# EAGLE board CT_schematic (EAGLE 7.6.0)

Size 100 x 80 mm. Coordinates in mm from the lower left corner, seen from the top.
Outline: 0,0 100,0 100,80 0,80 0,0
Copper layers (1*16): Top 0.035mm / dielectric 1.5mm / Bottom 0.035mm
Design rules "default": minimum track width 10mil, minimum drill 24mil, track to track 8mil, track to pad 8mil, pad to pad 8mil, via to via 8mil, smd to smd 8mil, copper to edge 40mil, drill to drill 8mil, minimum pad ring 10mil, minimum via ring 8mil, stop-mask expansion 4mil, vias tented up to drill 0mil, thermal gap 10mil

## Footprints (pad centres in the part's own frame; a part is rotated, then mirrored left to right if it is on the bottom)
C0603 = smd 0.8 x 0.8: 1 -0.762,0; 2 0.762,0
C0402 = smd 0.5 x 0.5: 1 -0.508,0; 2 0.508,0
C0805 = smd 1.2 x 1.3: 1 -1.016,0; 2 1.016,0
C1206 = smd 1.3 x 1.6: 1 -1.524,0; 2 1.524,0
2220 = smd 1.85 x 5.5: 1 -2.55,0; 2 2.55,0
R0603 = smd 0.8 x 0.8: 1 -0.762,0; 2 0.762,0
EXV-9H = smd 3.505 x 1.676: 1 -2.857,0; 2 2.857,0
L0603 = smd 0.8 x 0.8: 1 -0.762,0; 2 0.762,0
DR1040 = smd 1.6 x 3.2: 1 -4.458,0; 2 4.458,0
PJ-037B_PACKAGE = drill 3.7 square: 1 12,0 | drill 3.2 square: 2 6,0
UFBGA176_25 = smd 0.3 x 0.3: A1 -4.55,4.55; A2 -3.9,4.55; A3 -3.25,4.55; A4 -2.6,4.55; A5 -1.95,4.55; A6 -1.3,4.55; A7 -0.65,4.55; A8 0,4.55; A9 0.65,4.55; A10 1.3,4.55; A11 1.95,4.55; A12 2.6,4.55; A13 3.25,4.55; A14 3.9,4.55; A15 4.55,4.55; B1 -4.55,3.9; B2 -3.9,3.9; B3 -3.25,3.9; B4 -2.6,3.9; B5 -1.95,3.9; B6 -1.3,3.9; B7 -0.65,3.9; B8 0,3.9; B9 0.65,3.9; B10 1.3,3.9; B11 1.95,3.9; B12 2.6,3.9; B13 3.25,3.9; B14 3.9,3.9; B15 4.55,3.9; C1 -4.55,3.25; C2 -3.9,3.25; C3 -3.25,3.25; C4 -2.6,3.25; C5 -1.95,3.25; C6 -1.3,3.25; C7 -0.65,3.25; C8 0,3.25; C9 0.65,3.25; C10 1.3,3.25; C11 1.95,3.25; C12 2.6,3.25; C13 3.25,3.25; C14 3.9,3.25; C15 4.55,3.25; D1 -4.55,2.6; D2 -3.9,2.6; D3 -3.25,2.6; D4 -2.6,2.6; D5 -1.95,2.6; D6 -1.3,2.6; D7 -0.65,2.6; D8 0,2.6; D9 0.65,2.6; D10 1.3,2.6; D11 1.95,2.6; D12 2.6,2.6; D13 3.25,2.6; D14 3.9,2.6; D15 4.55,2.6; E1 -4.55,1.95; E2 -3.9,1.95; E3 -3.25,1.95; E4 -2.6,1.95; E12 2.6,1.95; E13 3.25,1.95; E14 3.9,1.95; E15 4.55,1.95; F1 -4.55,1.3; F2 -3.9,1.3; F3 -3.25,1.3; F4 -2.6,1.3; F6 -1.3,1.3; F7 -0.65,1.3; F8 0,1.3; F9 0.65,1.3; F10 1.3,1.3; F12 2.6,1.3; F13 3.25,1.3; F14 3.9,1.3; F15 4.55,1.3; G1 -4.55,0.65; G2 -3.9,0.65; G3 -3.25,0.65; G4 -2.6,0.65; G6 -1.3,0.65; G7 -0.65,0.65; G8 0,0.65; G9 0.65,0.65; G10 1.3,0.65; G12 2.6,0.65; G13 3.25,0.65; G14 3.9,0.65; G15 4.55,0.65; H1 -4.55,0; H2 -3.9,0; H3 -3.25,0; H4 -2.6,0; H6 -1.3,0; H7 -0.65,0; H8 0,0; H9 0.65,0; H10 1.3,0; H12 2.6,0; H13 3.25,0; H14 3.9,0; H15 4.55,0; J1 -4.55,-0.65; J2 -3.9,-0.65; J3 -3.25,-0.65; J4 -2.6,-0.65; J6 -1.3,-0.65; J7 -0.65,-0.65; J8 0,-0.65; J9 0.65,-0.65; J10 1.3,-0.65; J12 2.6,-0.65; J13 3.25,-0.65; J14 3.9,-0.65; J15 4.55,-0.65; K1 -4.55,-1.3; K2 -3.9,-1.3; K3 -3.25,-1.3; K4 -2.6,-1.3; K6 -1.3,-1.3; K7 -0.65,-1.3; K8 0,-1.3; K9 0.65,-1.3; K10 1.3,-1.3; K12 2.6,-1.3; K13 3.25,-1.3; K14 3.9,-1.3; K15 4.55,-1.3; L1 -4.55,-1.95; L2 -3.9,-1.95; L3 -3.25,-1.95; L4 -2.6,-1.95; L12 2.6,-1.95; L13 3.25,-1.95; L14 3.9,-1.95; L15 4.55,-1.95; M1 -4.55,-2.6; M2 -3.9,-2.6; M3 -3.25,-2.6; M4 -2.6,-2.6; M5 -1.95,-2.6; M6 -1.3,-2.6; M7 -0.65,-2.6; M8 0,-2.6; M9 0.65,-2.6; M10 1.3,-2.6; M11 1.95,-2.6; M12 2.6,-2.6; M13 3.25,-2.6; M14 3.9,-2.6; M15 4.55,-2.6; N1 -4.55,-3.25; N2 -3.9,-3.25; N3 -3.25,-3.25; N4 -2.6,-3.25; N5 -1.95,-3.25; N6 -1.3,-3.25; N7 -0.65,-3.25; N8 0,-3.25; N9 0.65,-3.25; N10 1.3,-3.25; N11 1.95,-3.25; N12 2.6,-3.25; N13 3.25,-3.25; N14 3.9,-3.25; N15 4.55,-3.25; P1 -4.55,-3.9; P2 -3.9,-3.9; P3 -3.25,-3.9; P4 -2.6,-3.9; P5 -1.95,-3.9; P6 -1.3,-3.9; P7 -0.65,-3.9; P8 0,-3.9; P9 0.65,-3.9; P10 1.3,-3.9; P11 1.95,-3.9; P12 2.6,-3.9; P13 3.25,-3.9; P14 3.9,-3.9; P15 4.55,-3.9; R1 -4.55,-4.55; R2 -3.9,-4.55; R3 -3.25,-4.55; R4 -2.6,-4.55; R5 -1.95,-4.55; R6 -1.3,-4.55; R7 -0.65,-4.55; R8 0,-4.55; R9 0.65,-4.55; R10 1.3,-4.55; R11 1.95,-4.55; R12 2.6,-4.55; R13 3.25,-4.55; R14 3.9,-4.55; R15 4.55,-4.55
SSOP-28 = smd 1.5 x 0.4: 1 -3.625,4.225; 2 -3.625,3.575; 3 -3.625,2.925; 4 -3.625,2.275; 5 -3.625,1.625; 6 -3.625,0.975; 7 -3.625,0.325; 8 -3.625,-0.325; 9 -3.625,-0.975; 10 -3.625,-1.625; 11 -3.625,-2.275; 12 -3.625,-2.925; 13 -3.625,-3.575; 14 -3.625,-4.225; 15 3.625,-4.225; 16 3.625,-3.575; 17 3.625,-2.925; 18 3.625,-2.275; 19 3.625,-1.625; 20 3.625,-0.975; 21 3.625,-0.325; 22 3.625,0.325; 23 3.625,0.975; 24 3.625,1.625; 25 3.625,2.275; 26 3.625,2.925; 27 3.625,3.575; 28 3.625,4.225
FCI_10118193-0001LF = smd 0.4 x 1.35: 1 -1.3,2.675; 2 -0.65,2.675; 3 0,2.675; 4 0.65,2.675; 5 1.3,2.675 | smd 1.6 x 1.4: 6 -3.2,2.45; 7 3.2,2.45 | smd 1.9 x 1.9: 8 -1.2,0; 9 1.2,0 | hole 0.5: -3.3,0; 3.3,0
TST-110-05-T-D-RA = drill 1 pad 1.7 square: 1 0,0 | drill 1 pad 1.7: 2 0,2.54; 3 2.54,0; 4 2.54,2.54; 5 5.08,0; 6 5.08,2.54; 7 7.62,0; 8 7.62,2.54; 9 10.16,0; 10 10.16,2.54; 11 12.7,0; 12 12.7,2.54; 13 15.24,0; 14 15.24,2.54; 15 17.78,0; 16 17.78,2.54; 17 20.32,0; 18 20.32,2.54; 19 22.86,0; 20 22.86,2.54
TDFN-8/6MM = smd 0.3 x 0.75: 1 0,0; 2 0.5,0; 3 1,0; 4 1.5,0; 5 1.5,3; 6 1,3; 7 0.5,3; 8 0,3
MOLEX_47219-2001 = smd 0.8 x 1.5: 1 3.2,-2.1; 2 2.1,-2.1; 3 1,-2.1; 4 -0.1,-2.1; 5 -1.2,-2.1; 6 -2.3,-2.1; 7 -3.4,-2.1; 8 -4.5,-2.1 | smd 1.5 x 2.05: G1 6.875,-4.7; G2 6.875,3.6; G3 -6.875,3.6; G4 -6.875,-4.7
ASEK = smd 1.4 x 1: 1 -1.1,-0.8; 2 1.1,-0.8; 3 1.1,0.8; 4 -1.1,0.8
ASFL1 = smd 1.7 x 1.5: 1 -1.27,-1.1; 2 1.27,-1.1; 3 1.27,1.1; 4 -1.27,1.1
IDT74FCT38072 = smd 0.51 x 1: 1 0,0; 2 1.27,0; 3 2.54,0; 4 3.81,0; 5 3.81,4.95; 6 2.54,4.95; 7 1.27,4.95; 8 0,4.95
WSON-8 = smd 0.3 x 0.6: 1 -0.75,0; 2 0.05,0; 3 0.85,0; 4 1.65,0; 5 1.65,3.8; 6 0.85,3.8; 7 0.05,3.8; 8 -0.75,3.8 | smd 3 x 2.6: PAD 0.45,1.9
QFN-16_EP = smd 0.805 x 0.3: 1 -1.452,0.75; 2 -1.452,0.25; 3 -1.452,-0.25; 4 -1.452,-0.75; 9 1.452,-0.75; 10 1.452,-0.25; 11 1.452,0.25; 12 1.452,0.75 | smd 0.3 x 0.805: 5 -0.75,-1.452; 6 -0.25,-1.452; 7 0.25,-1.452; 8 0.75,-1.452; 13 0.75,1.452; 14 0.25,1.452; 15 -0.25,1.452; 16 -0.75,1.452 | smd 1.55 x 1.55: 17 0,0
QFN-38_UHF = smd 0.75 x 0.3: 1 -2.4,2.75; 2 -2.4,2.25; 3 -2.4,1.75; 4 -2.4,1.25; 6 -2.4,0.25; 7 -2.4,-0.25; 8 -2.4,-0.75; 9 -2.4,-1.25; 10 -2.4,-1.75; 11 -2.4,-2.25; 12 -2.4,-2.75; 20 2.4,-2.75; 21 2.4,-2.25; 22 2.4,-1.75; 23 2.4,-1.25; 24 2.4,-0.75; 25 2.4,-0.25; 26 2.4,0.25; 27 2.4,0.75; 28 2.4,1.25; 29 2.4,1.75; 30 2.4,2.25; 31 2.4,2.75 | smd 0.758 x 0.3: 5 -2.4,0.75 | smd 0.3 x 0.75: 13 -1.5,-3.4; 14 -1,-3.4; 15 -0.5,-3.4; 16 0,-3.4; 17 0.5,-3.4; 18 1,-3.4; 19 1.5,-3.4; 32 1.5,3.4; 33 1,3.4; 34 0.5,3.4; 35 0,3.4; 36 -0.5,3.4; 37 -1,3.4; 38 -1.5,3.4 | smd 3.2 x 5.2: 39 0,0
IRF8306MTRPBF = smd 0.9 x 1.85: 1 0,0; 2 0,-2.35; 6 6.4,0; 7 6.4,-2.35 | smd 0.75 x 0.75: 3 1.75,-1.175 | smd 1.45 x 0.87: 4 3.5,-0.565; 5 3.5,-1.785
SW_4-1437565-2 = smd 1.4 x 2.1: 1 -2.23,4.55; 2 -2.23,-4.55; 3 2.23,4.55; 4 2.23,-4.55
LGM67K-G1J2-24-Z = smd 0.8 x 1.4: A -2,0; C 0,0
NC7SZ125M5X = smd 1.3 x 0.7: 1 -1.3,0.95; 2 -1.3,0; 3 -1.3,-0.95; 4 1.3,-0.95; 5 1.3,0.95

## Placement (x,y rotation side)
C1  1e-06  [C0603]  -77.47,76.2 0 top  (outside the outline)
C2  1e-07  [C0603]  -81.28,76.2 0 top  (outside the outline)
C3  1e-07  [C0603]  -85.09,76.2 0 top  (outside the outline)
C4  1e-07  [C0603]  -15.24,81.28 0 top  (outside the outline)
C5  1e-07  [C0603]  -19.05,81.28 0 top  (outside the outline)
C6  1e-07  [C0603]  -22.86,81.28 0 top  (outside the outline)
C7  1e-07  [C0603]  -26.67,81.28 0 top  (outside the outline)
C8  1e-07  [C0603]  -30.48,81.28 0 top  (outside the outline)
C9  1e-07  [C0603]  -34.29,81.28 0 top  (outside the outline)
C10  1e-07  [C0603]  -38.1,81.28 0 top  (outside the outline)
C11  1e-07  [C0603]  -41.91,81.28 0 top  (outside the outline)
C12  1e-07  [C0603]  -45.72,81.28 0 top  (outside the outline)
C13  1e-07  [C0603]  -49.53,81.28 0 top  (outside the outline)
C14  1e-07  [C0603]  -53.34,81.28 0 top  (outside the outline)
C15  1e-07  [C0603]  -57.15,81.28 0 top  (outside the outline)
C16  1e-07  [C0603]  -60.96,81.28 0 top  (outside the outline)
C17  4.7e-06  [C0603]  -69.85,76.2 0 top  (outside the outline)
C18  1e-08  [C0603]  -64.77,81.28 0 top  (outside the outline)
C19  1e-06  [C0603]  -68.58,81.28 0 top  (outside the outline)
C20  1e-07  [C0402]  -49.53,86.36 0 top  (outside the outline)
C21  1e-07  [C0402]  -53.34,86.36 0 top  (outside the outline)
C22  1e-07  [C0402]  -57.15,86.36 0 top  (outside the outline)
C23  4.7e-06  [C0805]  -63.5,58.42 0 top  (outside the outline)
C24  1e-07  [C0402]  -60.96,86.36 0 top  (outside the outline)
C25  1e-07  [C0402]  -64.77,86.36 0 top  (outside the outline)
C26  1e-07  [C0402]  -68.58,86.36 0 top  (outside the outline)
C27  4.7e-06  [C0805]  -68.58,58.42 0 top  (outside the outline)
C28  1e-07  [C0402]  -72.39,86.36 0 top  (outside the outline)
C29  1e-07  [C0402]  -76.2,86.36 0 top  (outside the outline)
C30  1e-07  [C0402]  -80.01,86.36 0 top  (outside the outline)
C31  1e-07  [C0402]  -83.82,86.36 0 top  (outside the outline)
C32  1e-08  [C0402]  -87.63,86.36 0 top  (outside the outline)
C33  1e-07  [C0402]  -15.24,91.44 0 top  (outside the outline)
C34  1e-05  [C0805]  -73.66,58.42 0 top  (outside the outline)
C35  1e-08  [C0402]  -19.05,91.44 0 top  (outside the outline)
C36  1e-08  [C0402]  -22.86,91.44 0 top  (outside the outline)
C37  1e-08  [C0402]  -26.67,91.44 0 top  (outside the outline)
C38  1e-08  [C0402]  -30.48,91.44 0 top  (outside the outline)
C39  1e-08  [C0402]  -34.29,91.44 0 top  (outside the outline)
C40  1e-05  [C1206]  -39.37,58.42 0 top  (outside the outline)
C41  1e-05  [C0805]  -78.74,58.42 0 top  (outside the outline)
C42  1e-05  [C0805]  -83.82,58.42 0 top  (outside the outline)
C43  1e-06  [C0603]  -72.39,81.28 0 top  (outside the outline)
C44  1e-07  [C0402]  -38.1,91.44 0 top  (outside the outline)
C45  6.8e-05  [2220]  -16.51,34.29 0 top  (outside the outline)
C46  1e-08  [C0402]  -41.91,91.44 0 top  (outside the outline)
C47  1e-05  [C1206]  -45.72,58.42 0 top  (outside the outline)
C48  1e-05  [C0805]  -15.24,66.04 0 top  (outside the outline)
C49  1e-07  [C0402]  -45.72,91.44 0 top  (outside the outline)
C50  2.2e-06  [C0603]  -73.66,76.2 0 top  (outside the outline)
C51  2.45e-08  [R0603]  -15.24,71.12 0 top  (outside the outline)
C52  2.8258362168397e-09  [R0603]  -25.4,66.04 0 top  (outside the outline)
C53  7.105e-09  [R0603]  -38.1,66.04 0 top  (outside the outline)
C54  0.0001  [EXV-9H]  -74.93,52.07 0 top  (outside the outline)
C55  0.0001  [EXV-9H]  -17.78,59.69 0 top  (outside the outline)
C56  1e-08  [C0402]  -49.53,91.44 0 top  (outside the outline)
C57  1e-08  [C0402]  -53.34,91.44 0 top  (outside the outline)
F1  240.0  [L0603]  -76.2,81.28 0 top  (outside the outline)
I1  3.8e-06  [DR1040]  -38.1,22.86 0 top  (outside the outline)
J1  PJ-037B  [PJ-037B_PACKAGE]  -87.63,7.62 0 top  (outside the outline)
R2  1000.0  [R0603]  -80.01,81.28 0 top  (outside the outline)
R7  4700.0  [R0603]  -83.82,81.28 0 top  (outside the outline)
R8  2200.0  [R0603]  -87.63,81.28 0 top  (outside the outline)
R10  2200.0  [R0603]  -15.24,86.36 0 top  (outside the outline)
R12  10000.0  [R0603]  -20.32,71.12 0 top  (outside the outline)
R13  10000.0  [R0603]  -25.4,71.12 0 top  (outside the outline)
R14  10000.0  [R0603]  -30.48,71.12 0 top  (outside the outline)
R15  10000.0  [R0603]  -35.56,71.12 0 top  (outside the outline)
R16  4700.0  [R0603]  -19.05,86.36 0 top  (outside the outline)
R17  10000.0  [R0603]  -40.64,71.12 0 top  (outside the outline)
R18  10000.0  [R0603]  -45.72,71.12 0 top  (outside the outline)
R19  4700.0  [R0603]  -22.86,86.36 0 top  (outside the outline)
R20  10000.0  [R0603]  -50.8,71.12 0 top  (outside the outline)
R21  10000.0  [R0603]  -55.88,71.12 0 top  (outside the outline)
R22  10000.0  [R0603]  -60.96,71.12 0 top  (outside the outline)
R23  10000.0  [R0603]  -66.04,71.12 0 top  (outside the outline)
R24  10000.0  [R0603]  -71.12,71.12 0 top  (outside the outline)
R25  10000.0  [R0603]  -76.2,71.12 0 top  (outside the outline)
R26  10000.0  [R0603]  -81.28,71.12 0 top  (outside the outline)
R27  10000.0  [R0603]  -86.36,71.12 0 top  (outside the outline)
R28  100000.0  [R0603]  -43.18,66.04 0 top  (outside the outline)
R29  100000.0  [R0603]  -48.26,66.04 0 top  (outside the outline)
R30  100000.0  [R0603]  -53.34,66.04 0 top  (outside the outline)
R31  100000.0  [R0603]  -58.42,66.04 0 top  (outside the outline)
R32  100000.0  [R0603]  -63.5,66.04 0 top  (outside the outline)
R33  100000.0  [R0603]  -68.58,66.04 0 top  (outside the outline)
R34  100000.0  [R0603]  -73.66,66.04 0 top  (outside the outline)
R35  200.0  [R0603]  -26.67,86.36 0 top  (outside the outline)
R36  1000.0  [R0603]  -30.48,86.36 0 top  (outside the outline)
R37  20000.0  [R0603]  -15.24,76.2 0 top  (outside the outline)
R38  91000.0  [R0603]  -20.32,76.2 0 top  (outside the outline)
R39  300000.0  [R0603]  -78.74,66.04 0 top  (outside the outline)
R40  100000.0  [R0603]  -83.82,66.04 0 top  (outside the outline)
R41  200.0  [R0603]  -34.29,86.36 0 top  (outside the outline)
R42  1000.0  [R0603]  -38.1,86.36 0 top  (outside the outline)
R43  10000.0  [R0603]  -25.4,76.2 0 top  (outside the outline)
R44  75000.0  [R0603]  -30.48,76.2 0 top  (outside the outline)
R45  10000.0  [R0603]  -35.56,76.2 0 top  (outside the outline)
R46  10000.0  [R0603]  -40.64,76.2 0 top  (outside the outline)
R47  95300.0  [R0603]  -45.72,76.2 0 top  (outside the outline)
R48  95300.0  [R0603]  -50.8,76.2 0 top  (outside the outline)
R49  10000.0  [R0603]  -55.88,76.2 0 top  (outside the outline)
R50  10000.0  [R0603]  -60.96,76.2 0 top  (outside the outline)
R51  10000.0  [R0603]  -66.04,76.2 0 top  (outside the outline)
R52  84636.363636364  [R0603]  -33.02,66.04 0 top  (outside the outline)
U1  STM32F427IIH6  [UFBGA176_25]  -64.77,6.35 0 top  (outside the outline)
U2  FT232RL-REEL  [SSOP-28]  -40.64,7.62 0 top  (outside the outline)
U3  10118193-0001LF  [FCI_10118193-0001LF]  -35.56,41.91 0 top  (outside the outline)
U4  FT232RL-REEL  [SSOP-28]  -53.34,7.62 0 top  (outside the outline)
U5  10118193-0001LF  [FCI_10118193-0001LF]  -45.72,41.91 0 top  (outside the outline)
U6  TST-110-05-T-D-RA  [TST-110-05-T-D-RA]  -46.99,49.53 0 top  (outside the outline)
U7  24AA01T-I/MNY  [TDFN-8/6MM]  -54.61,20.32 0 top  (outside the outline)
U8  0472192001  [MOLEX_47219-2001]  -22.86,8.89 0 top  (outside the outline)
U9  ASEK-32.768KHz-ECST  [ASEK]  -66.04,52.07 0 top  (outside the outline)
U10  ASFL1-12MHZ-NCS  [ASFL1]  -74.93,33.02 0 top  (outside the outline)
U11  idt74fct38072  [IDT74FCT38072]  -76.2,40.64 0 top  (outside the outline)
U12  ASFL1-25MHZ-NCS  [ASFL1]  -26.67,43.18 0 top  (outside the outline)
U13  LP3878SDX-ADJ/NOPB  [WSON-8]  -38.1,31.75 0 top  (outside the outline)
U14  LTC3601EUD#PBF  [QFN-16_EP]  -43.18,86.36 0 top  (outside the outline)
U15  LP3878SDX-ADJ/NOPB  [WSON-8]  -58.42,31.75 0 top  (outside the outline)
U16  LTC2928CUHF#PBF  [QFN-38_UHF]  -54.61,43.18 0 top  (outside the outline)
U17  IRF8306MTRPbF  [IRF8306MTRPBF]  -71.12,22.86 0 top  (outside the outline)
U18  IRF8306MTRPbF  [IRF8306MTRPBF]  -86.36,22.86 0 top  (outside the outline)
U19  4-1437565-2  [SW_4-1437565-2]  -27.94,22.86 0 top  (outside the outline)
U20  Q65110A2395  [LGM67K-G1J2-24-Z]  -27.94,59.69 0 top  (outside the outline)
U21  nc7sz125m5x  [NC7SZ125M5X]  -50.8,58.42 0 top  (outside the outline)
U22  nc7sz125m5x  [NC7SZ125M5X]  -57.15,58.42 0 top  (outside the outline)

## Library data of the parts
C1-C57 F1 I1 J1 R2 R7 R8 R10 R12-R52 U1-U22 = circuit_tree

## Nets
CLK_U1_E1: U1.E1 U9.3
CLK_U1_G1: U1.G1 U12.3
CLK_U2_27: U2.27 U11.7
CLK_U4_27: U4.27 U11.6
CLK_U11_3: U10.3 U11.3
GND: C1.2 C2.2 C3.2 C4.2 C5.2 C6.2 C7.2 C8.2 C9.2 C10.2 C11.2 C12.2 C13.2 C14.2 C15.2 C16.2 C17.2 C18.2 C19.2 C20.2 C21.2 C22.2 C23.2 C24.2 C25.2 C26.2 C27.2 C28.2 C29.2 C30.2 C31.2 C32.2 C33.2 C34.2 C35.2 C36.2 C37.2 C38.2 C39.2 C40.2 C41.2 C42.2 C43.2 C45.1 C45.2 C46.2 C47.2 C48.2 C49.2 C50.2 C51.2 C52.2 C53.2 C54.2 C55.2 C56.2 C57.2 J1.2 R2.2 R18.2 R21.2 R27.2 R36.2 R37.2 R39.2 R42.2 R44.2 R47.2 R48.2 R49.2 R50.2 R51.2 U1.D5 U1.D7 U1.D8 U1.D9 U1.F2 U1.F6 U1.F7 U1.F8 U1.F9 U1.F10 U1.F12 U1.G2 U1.G6 U1.G7 U1.G8 U1.G9 U1.G10 U1.G12 U1.H6 U1.H7 U1.H8 U1.H9 U1.H10 U1.H12 U1.J6 U1.J7 U1.J8 U1.J9 U1.J10 U1.K6 U1.K7 U1.K8 U1.K9 U1.K10 U1.M1 U1.M8 U1.M9 U1.N1 U2.7 U2.18 U2.21 U2.25 U2.26 U3.5 U3.6 U3.7 U3.8 U3.9 U4.7 U4.18 U4.21 U4.25 U4.26 U5.5 U5.6 U5.7 U5.8 U5.9 U6.4 U6.6 U6.8 U6.10 U6.12 U6.14 U6.16 U6.18 U6.20 U7.4 U8.6 U8.G1 U8.G2 U8.G3 U8.G4 U9.2 U10.2 U11.4 U11.5 U11.8 U12.2 U13.3 U13.PAD U14.1 U14.9 U14.17 U15.3 U15.PAD U16.8 U16.9 U16.10 U16.12 U16.13 U16.24 U16.25 U16.30 U16.32 U16.39 U20.C U21.2 U21.3 U22.1 U22.3
NET_U1_A5: R8.1 U1.A5 U7.6
NET_U1_B4: R10.1 U1.B4 U7.5
NET_U1_C6: R12.1 U1.C6
NET_U1_D6: R13.1 U1.D6
NET_U1_F13: C21.1 U1.F13
NET_U1_J1: R7.1 U1.J1 U22.4
NET_U1_L4: R15.1 U1.L4
NET_U1_M6: R14.1 U1.M6
NET_U1_R1: C18.1 C19.1 F1.1 U1.P1 U1.R1
NET_U1_R14: U20.A
NET_U1_R15: U19.3 U19.4
NET_U2_14: R17.1 U2.14
NET_U2_17: C24.1 U2.17
NET_U2_19: R18.1 U2.19
NET_U3_1: R16.1 U3.1
NET_U3_2: U2.16 U3.2
NET_U3_3: U2.15 U3.3
NET_U3_19: R16.2
NET_U4_14: R20.1 U4.14
NET_U4_17: C28.1 U4.17
NET_U4_19: R21.1 U4.19
NET_U5_1: R19.1 U5.1
NET_U5_2: U4.16 U5.2
NET_U5_3: U4.15 U5.3
NET_U5_19: R19.2
NET_U6_19: R27.1 U6.19
NET_U13_1: C39.1 U13.1
NET_U13_6: R35.2 R36.1 U13.6
NET_U13_8: R34.1 U13.8
NET_U14_3: C44.2 I1.1 U14.3 U14.4
NET_U14_6: C44.1 U14.6
NET_U14_7: C43.1 U14.7 U14.12
NET_U14_10: R39.1 U14.10
NET_U14_11: R37.1 R38.1 U14.11
NET_U14_14: U14.14
NET_U14_ATNET_3: I1.2 R38.2
NET_U15_1: C46.1 U15.1
NET_U15_6: R41.2 R42.1 U15.6
NET_U15_8: R40.1 U15.8
NET_U16_3: R50.1 U16.3
NET_U16_6: R47.1 U16.6
NET_U16_7: R48.1 U16.7
NET_U16_16: R49.1 R52.1 U16.16
NET_U16_18: R46.1 U16.18
NET_U16_19: R45.1 U16.19 U16.20
NET_U16_21: R43.1 R44.1 U16.21 U21.4 U22.2
NET_U16_22: C49.1 R43.2 R45.2 R46.2 U16.11 U16.22
NET_U16_26: C52.1 U16.26
NET_U16_27: C51.1 U16.27
NET_U16_28: C53.1 U16.28
NET_U16_38: R51.1 U16.38
NET_U17_3: U16.2 U17.3
NET_U18_3: U16.37 U18.3
NET_U19_1: R2.1 U19.1 U19.2
PROC_SDIO_CK: R29.1 U1.A12 U8.5
PROC_SDIO_CMD: R28.1 U1.D12 U8.3
PROC_SDIO_D0: R30.1 U1.G14 U8.7
PROC_SDIO_D1: R31.1 U1.F14 U8.8
PROC_SDIO_D2: R32.1 U1.B14 U8.1
PROC_SDIO_D3: R33.1 U1.B13 U8.2
PROC_SYS_JTCK_SWCLK: R25.1 U1.A14 U6.9
PROC_SYS_JTDI: R23.1 U1.A13 U6.5
PROC_SYS_JTDO_SWO: U1.A10 U6.13
PROC_SYS_JTMS_SWDIO: R24.1 U1.A15 U6.7
PROC_SYS_JTRST: R22.1 U1.A9 U6.3
PROC_UART7_RX: U1.K2 U2.1
PROC_UART7_TX: U1.K1 U2.5
PROC_UART8_RX: U1.A4 U4.1
PROC_UART8_TX: U1.A3 U4.5
RST_OUT_U6_SRESET_B: R26.1 U6.15 U21.1
VCC_10V6: C50.1 C54.1 C55.1 J1.1 R52.2 U16.23 U17.1 U17.2 U17.6 U17.7 U18.1 U18.2 U18.6 U18.7
VCC_S1_10V6: C40.1 C42.1 R34.2 U13.4 U14.15 U14.16 U17.4 U17.5
VCC_S2_10V6: C47.1 R40.2 U15.4 U18.4 U18.5
VCC_TIER1_1V2: C20.1 C41.1 R35.1 U1.M10 U13.5
VCC_TIER1_3V3: C1.1 C2.1 C3.1 C4.1 C5.1 C6.1 C7.1 C8.1 C9.1 C10.1 C11.1 C12.1 C13.1 C14.1 C15.1 C16.1 C17.1 C22.1 C23.1 C25.1 C26.1 C27.1 C29.1 C30.1 C31.1 C32.1 C33.1 C34.1 C35.1 C36.1 C37.1 C38.1 C45.2 C56.1 C57.1 F1.2 I1.2 R7.2 R8.2 R10.2 R12.2 R13.2 R14.2 R15.2 R17.2 R20.2 R22.2 R23.2 R24.2 R25.2 R26.2 R28.2 R29.2 R30.2 R31.2 R32.2 R33.2 R38.2 U1.C1 U1.C5 U1.C7 U1.C8 U1.C9 U1.F3 U1.G3 U1.G13 U1.H13 U1.J12 U1.J13 U1.K4 U1.N8 U1.N9 U1.N10 U2.4 U2.20 U4.4 U4.20 U6.1 U6.2 U7.7 U7.8 U8.4 U9.4 U10.4 U11.1 U11.2 U12.4 U14.8 U21.5 U22.5
VCC_TIER2_1V2: C48.1 R41.1 U15.5

## Tracks (layer width: path | path; a pad name or v marks a point on that pad's centre or on a via)
CLK_U1_E1  (1 unrouted)
CLK_U1_G1  (1 unrouted)
CLK_U2_27  (1 unrouted)
CLK_U4_27  (1 unrouted)
CLK_U11_3  (1 unrouted)
GND  (172 unrouted)
NET_U1_A5  (2 unrouted)
NET_U1_B4  (2 unrouted)
NET_U1_C6  (1 unrouted)
NET_U1_D6  (1 unrouted)
NET_U1_F13  (1 unrouted)
NET_U1_J1  (2 unrouted)
NET_U1_L4  (1 unrouted)
NET_U1_M6  (1 unrouted)
NET_U1_R1  (4 unrouted)
NET_U1_R15  (1 unrouted)
NET_U2_14  (1 unrouted)
NET_U2_17  (1 unrouted)
NET_U2_19  (1 unrouted)
NET_U3_1  (1 unrouted)
NET_U3_2  (1 unrouted)
NET_U3_3  (1 unrouted)
NET_U4_14  (1 unrouted)
NET_U4_17  (1 unrouted)
NET_U4_19  (1 unrouted)
NET_U5_1  (1 unrouted)
NET_U5_2  (1 unrouted)
NET_U5_3  (1 unrouted)
NET_U6_19  (1 unrouted)
NET_U13_1  (1 unrouted)
NET_U13_6  (2 unrouted)
NET_U13_8  (1 unrouted)
NET_U14_3  (3 unrouted)
NET_U14_6  (1 unrouted)
NET_U14_7  (2 unrouted)
NET_U14_10  (1 unrouted)
NET_U14_11  (2 unrouted)
NET_U14_ATNET_3  (1 unrouted)
NET_U15_1  (1 unrouted)
NET_U15_6  (2 unrouted)
NET_U15_8  (1 unrouted)
NET_U16_3  (1 unrouted)
NET_U16_6  (1 unrouted)
NET_U16_7  (1 unrouted)
NET_U16_16  (2 unrouted)
NET_U16_18  (1 unrouted)
NET_U16_19  (2 unrouted)
NET_U16_21  (4 unrouted)
NET_U16_22  (5 unrouted)
NET_U16_26  (1 unrouted)
NET_U16_27  (1 unrouted)
NET_U16_28  (1 unrouted)
NET_U16_38  (1 unrouted)
NET_U17_3  (1 unrouted)
NET_U18_3  (1 unrouted)
NET_U19_1  (2 unrouted)
PROC_SDIO_CK  (2 unrouted)
PROC_SDIO_CMD  (2 unrouted)
PROC_SDIO_D0  (2 unrouted)
PROC_SDIO_D1  (2 unrouted)
PROC_SDIO_D2  (2 unrouted)
PROC_SDIO_D3  (2 unrouted)
PROC_SYS_JTCK_SWCLK  (2 unrouted)
PROC_SYS_JTDI  (2 unrouted)
PROC_SYS_JTDO_SWO  (1 unrouted)
PROC_SYS_JTMS_SWDIO  (2 unrouted)
PROC_SYS_JTRST  (2 unrouted)
PROC_UART7_RX  (1 unrouted)
PROC_UART7_TX  (1 unrouted)
PROC_UART8_RX  (1 unrouted)
PROC_UART8_TX  (1 unrouted)
RST_OUT_U6_SRESET_B  (2 unrouted)
VCC_10V6  (13 unrouted)
VCC_S1_10V6  (7 unrouted)
VCC_S2_10V6  (4 unrouted)
VCC_TIER1_1V2  (4 unrouted)
VCC_TIER1_3V3  (89 unrouted)
VCC_TIER2_1V2  (2 unrouted)